# EAGLE board Gyrocam Servo Driver STM32G070KBT6_batch (EAGLE 9.6.2)
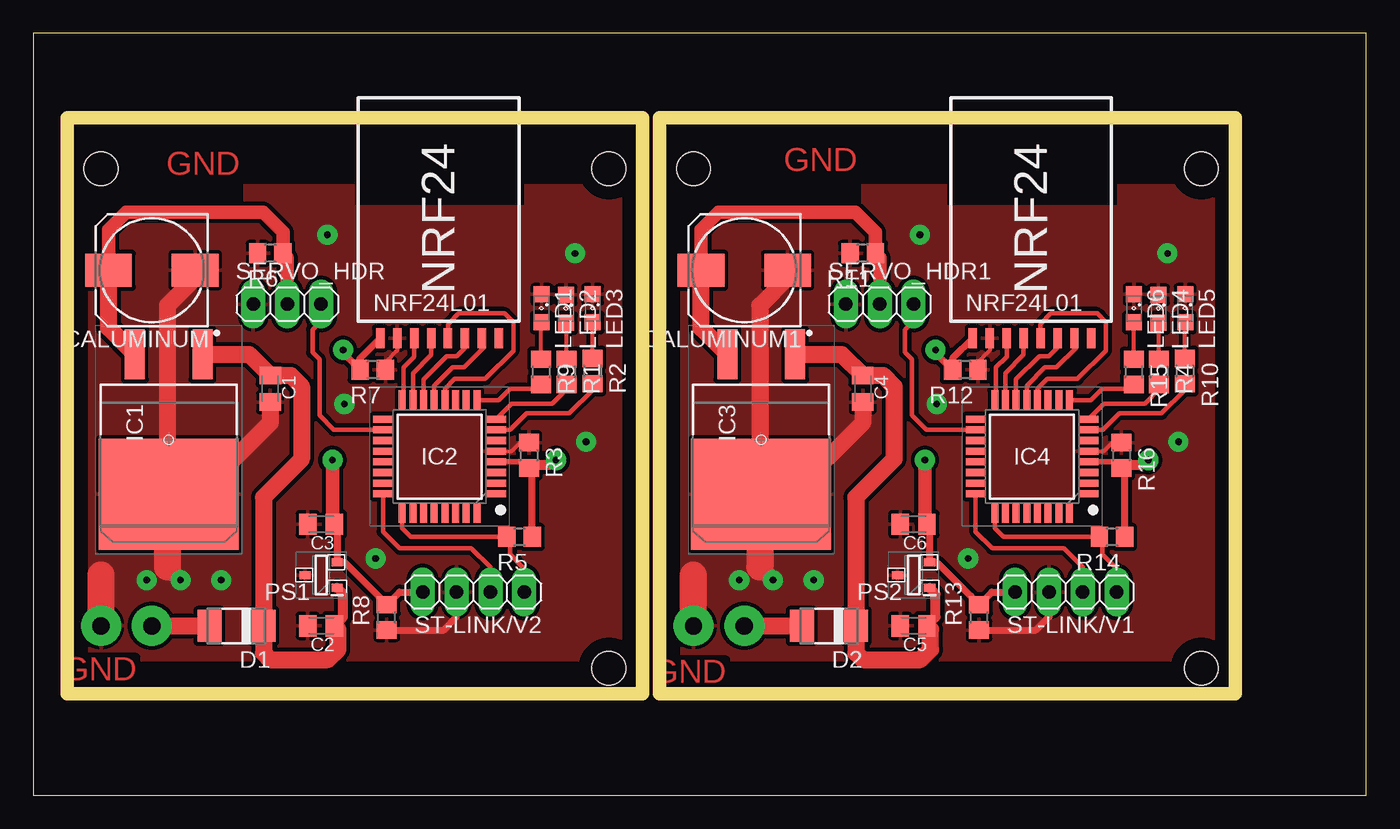
[diagram p0: board, top side]
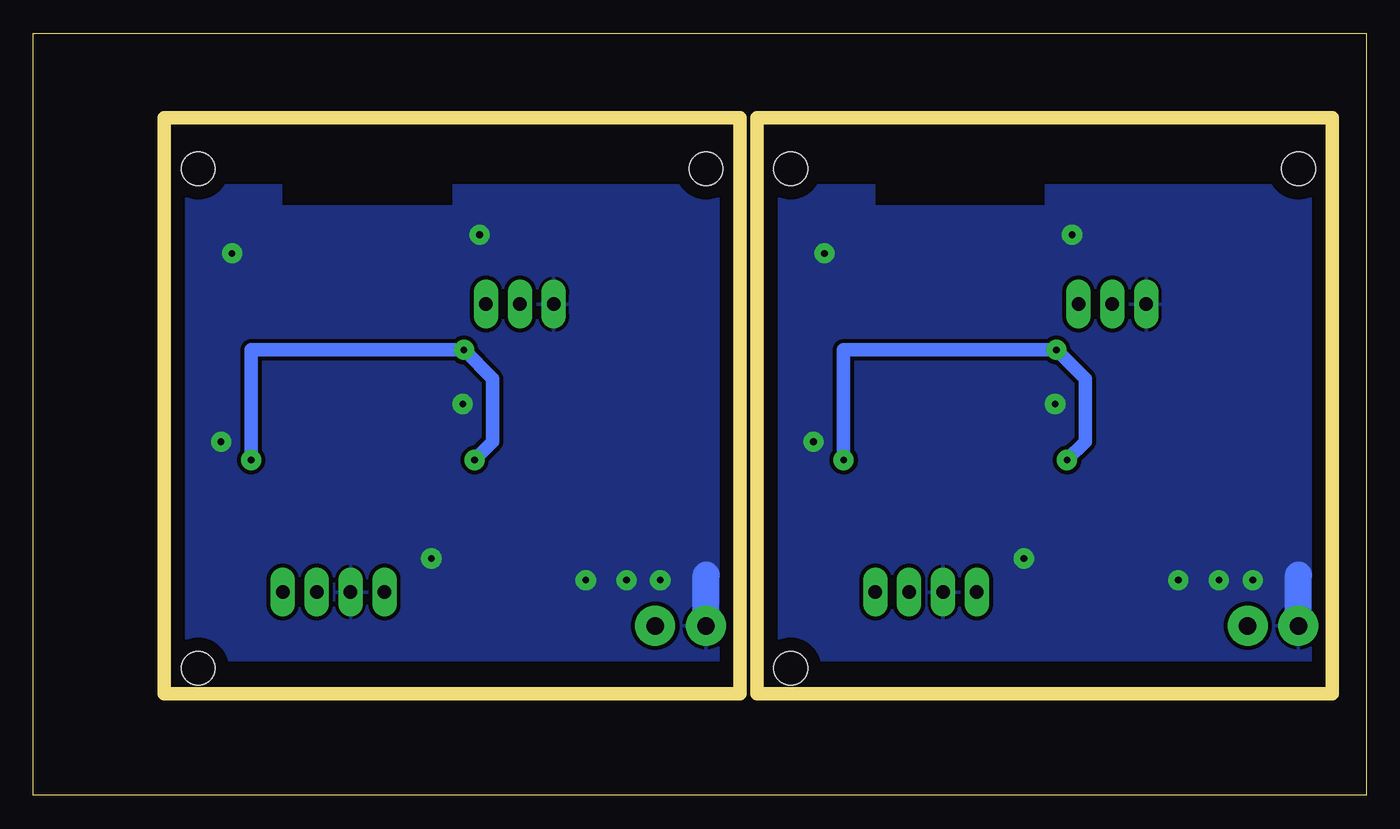
[diagram p1: board, bottom side, seen from below]

Size 100 x 57.14 mm. Coordinates in mm from the lower left corner, seen from the top.
Outline: 0,0 100,0 100,57.14 0,57.14 0,0
Outline: 2.54,7.62 45.72,7.62 45.72,50.8 2.54,50.8 2.54,7.62
Outline: 46.99,7.62 90.17,7.62 90.17,50.8 46.99,50.8 46.99,7.62
Copper layers (1*16): Top 0.035mm / dielectric 1.5mm / Bottom 0.035mm
Design rules "default *": minimum track width 6mil, minimum drill 0.35mm, track to track 12mil, track to pad 12mil, pad to pad 12mil, via to via 12mil, smd to smd 6mil, copper to edge 40mil, drill to drill 6mil, minimum pad ring 16mil, minimum via ring 20mil, stop-mask expansion 4mil, vias tented up to drill 0mil, thermal gap 10mil
Holes 2.54 mm at 5.08,46.99 43.18,46.99 43.18,9.53 49.53,46.99 87.63,46.99 87.63,9.53
Milling: 8 lines

## Footprints (pad centres in the part's own frame; a part is rotated, then mirrored left to right if it is on the bottom)
C0805K = smd 1.3 x 1.6: 1 -1,0; 2 1,0
153CLV-0810 = smd 3.5 x 2.5: + 3.25,0; - -3.25,0
DO-214AC = smd 1.8 x 2.4: A 2.025,0; C -2.025,0
TO254P1542X460-3N = smd 3.75 x 1.5: 1 -6.4,2.54; 3 -6.4,-2.54 | smd 8.3 x 10.5: 4 4.1,0
QFP80P900X900X160-32N = smd 1.475 x 0.533: 1 -4.238,2.8; 2 -4.238,2; 3 -4.238,1.2; 4 -4.238,0.4; 5 -4.238,-0.4; 6 -4.238,-1.2; 7 -4.238,-2; 8 -4.238,-2.8; 17 4.238,-2.8; 18 4.238,-2; 19 4.238,-1.2; 20 4.238,-0.4; 21 4.238,0.4; 22 4.238,1.2; 23 4.238,2; 24 4.238,2.8 | smd 0.533 x 1.475: 9 -2.8,-4.238; 10 -2,-4.238; 11 -1.2,-4.238; 12 -0.4,-4.238; 13 0.4,-4.238; 14 1.2,-4.238; 15 2,-4.238; 16 2.8,-4.238; 25 2.8,4.238; 26 2,4.238; 27 1.2,4.238; 28 0.4,4.238; 29 -0.4,4.238; 30 -1.2,4.238; 31 -2,4.238; 32 -2.8,4.238
SML0805 = smd 1.2 x 1.2: A 1.05,0; C -1.05,0
SOT96P240X120-3N = smd 0.85 x 0.6: 1 -1.2,0.96; 2 -1.2,-0.96; 3 1.2,0
R0805 = smd 1.3 x 1.5: 1 -0.95,0; 2 0.95,0
1X03 = drill 1.016 long: 1 -2.54,0; 2 0,0; 3 2.54,0
1X04 = drill 1.016 long: 1 -3.81,0; 2 -1.27,0; 3 1.27,0; 4 3.81,0
NRF24L01_SMD = smd 1.5 x 0.635: 1 0,4.445; 2 0,3.175; 3 0,1.905; 4 0,0.635; 5 0,-0.635; 6 0,-1.905; 7 0,-3.175; 8 0,-4.445
PINHEAD2_18AWG = drill 1.3 pad 3: 1 0,1.27; 2 0,-2.54

## Placement (x,y rotation side)
C1  0.1uf  [C0805K]  17.78,30.48 270 top
C2  2uf  [C0805K]  21.59,12.7 180 top
C3  2uf  [C0805K]  21.59,20.32 180 top
C4  0.1uf  [C0805K]  62.23,30.48 270 top
C5  2uf  [C0805K]  66.04,12.7 180 top
C6  2uf  [C0805K]  66.04,20.32 180 top
CALUMINUM  220uF  [153CLV-0810]  8.89,39.37 180 top
CALUMINUM1  220uF  [153CLV-0810]  53.34,39.37 180 top
D1  DIODE  [DO-214AC]  15.24,12.7 180 top
D2  DIODE  [DO-214AC]  59.69,12.7 180 top
IC1  L7815CD2T-TR  [TO254P1542X460-3N]  10.16,26.67 270 top
IC2  STM32G070KBT6  [QFP80P900X900X160-32N]  30.48,25.4 180 top
IC3  L7815CD2T-TR  [TO254P1542X460-3N]  54.61,26.67 270 top
IC4  STM32G070KBT6  [QFP80P900X900X160-32N]  74.93,25.4 180 top
LED1  LEDG  [SML0805]  38.13,36.51 270 top
LED2  LEDY  [SML0805]  39.97,36.48 270 top
LED3  LEDR  [SML0805]  41.97,36.51 270 top
LED4  LEDY  [SML0805]  84.42,36.48 270 top
LED5  LEDR  [SML0805]  86.42,36.51 270 top
LED6  LEDG  [SML0805]  82.58,36.51 270 top
PS1  AP7381-33SA-7  [SOT96P240X120-3N]  21.59,16.51 180 top
PS2  AP7381-33SA-7  [SOT96P240X120-3N]  66.04,16.51 180 top
R1  330  [R0805]  40.01,31.75 270 top
R2  330  [R0805]  41.94,31.81 270 top
R3  .1uF  [R0805]  37.18,25.5 270 top
R4  330  [R0805]  84.45,31.75 270 top
R5  1k  [R0805]  36.48,19.37 180 top
R6  0.1uF  [R0805]  17.78,40.64 180 top
R7  .1uF  [R0805]  25.46,31.91 180 top
R8  0.1uF  [R0805]  26.51,13.34 90 top
R9  330  [R0805]  38.1,31.75 270 top
R10  330  [R0805]  86.39,31.81 270 top
R11  0.1uF  [R0805]  62.23,40.64 180 top
R12  .1uF  [R0805]  69.91,31.91 180 top
R13  0.1uF  [R0805]  70.96,13.34 90 top
R14  1k  [R0805]  80.93,19.37 180 top
R15  330  [R0805]  82.55,31.75 270 top
R16  .1uF  [R0805]  81.63,25.5 270 top
SERVO_HDR  [1X03]  19.05,36.83 0 top
SERVO_HDR1  [1X03]  63.5,36.83 0 top
ST-LINK/V1  [1X04]  77.47,15.24 180 top
ST-LINK/V2  [1X04]  33.02,15.24 180 top
U$1  NRF24L01  [NRF24L01_SMD]  74.93,34.29 90 top
U$2  NRF24L01  [NRF24L01_SMD]  30.48,34.29 90 top
U$3  PINHEAD2_18AAWG  [PINHEAD2_18AWG]  52.07,12.7 270 top
U$5  PINHEAD2_18AAWG  [PINHEAD2_18AWG]  7.62,12.7 270 top

## Library data of the parts
C1-C6 CALUMINUM CALUMINUM1 = rcl; SPICEPREFIX: C
D1 D2 = diode
IC1 IC3 = 6voltsL7815CD2T-TR; DESCRIPTION: Voltage Regulator 15V 1.5A D2PAK STMicroelectronics L7815CD2T-TR, Single Linear Voltage Regulator, 1.5A 15 V, 3-Pin D2PAK; HEIGHT: 4.6mm; MANUFACTURER_NAME: STMicroelectronics; MANUFACTURER_PART_NUMBER: L7815CD2T-TR; MOUSER_PART_NUMBER: 511-L7815CD2T-TR; MOUSER_PRICE-STOCK: https://www.mouser.co.uk/ProductDetail/STMicroelectronics/L7815CD2T-TR?qs=UnsPL7ngM55qtUyn38JDrw%3D%3D
IC2 IC4 = mouser-STM32G070KBT6; DESCRIPTION: 32-bit Microcontrollers - MCU Arm Cortex -M0+ 32-bit MCU, 128 KB Flash, 36 KB RAM, 4x USART, timers, ADC, comm. I/Fs, 2.0-3.6V; HEIGHT: 1.6mm; MANUFACTURER_NAME: STMicroelectronics; MANUFACTURER_PART_NUMBER: STM32G070KBT6; MOUSER_PART_NUMBER: 511-STM32G070KBT6; MOUSER_PRICE-STOCK: https://www.mouser.co.uk/ProductDetail/STMicroelectronics/STM32G070KBT6?qs=l7cgNqFNU1hmGcXjKEot4A%3D%3D
LED1-LED6 = led
PS1 PS2 = 3.3v_AP7381-33SA-7; DESCRIPTION: LDO CMOS LowCurr SOT23 T&R 3K; HEIGHT: 1.2mm; MANUFACTURER_NAME: Diodes Inc.; MANUFACTURER_PART_NUMBER: AP7381-33SA-7; MOUSER_PART_NUMBER: 621-AP7381-33SA-7; MOUSER_PRICE-STOCK: https://www.mouser.co.uk/ProductDetail/Diodes-Incorporated/AP7381-33SA-7?qs=y6ZabgHbY%252ByfboEZm%252BnPlA%3D%3D
R1-R16 = rcl; SPICEPREFIX: R
SERVO_HDR SERVO_HDR1 ST-LINK/V1 ST-LINK/V2 = pinhead
U$1-U$3 U$5 = Gil

## Nets
12V: C1.1 C2.1 D1.C IC1.1 PS1.1
12V1: C4.1 C5.1 D2.C IC3.1 PS2.1
+3V1: C6.1 IC4.4 PS2.2 R12.2 R13.2 R14.1 R16.2 ST-LINK/V1.4 U$1.1
+3V3: C3.1 IC2.4 PS1.2 R3.2 R5.1 R7.2 R8.2 ST-LINK/V2.4 U$2.1
+5V: CALUMINUM.+ IC1.3 R6.1 SERVO_HDR.2
+5V1: CALUMINUM1.+ IC3.3 R11.1 SERVO_HDR1.2
+12V: D1.A U$5.1
+12V1: D2.A U$3.1
CE: IC2.16 U$2.3
CE1: IC4.16 U$1.3
CSN: IC2.15 U$2.4
CSN1: IC4.15 U$1.4
GND: C1.2 C2.2 C3.2 CALUMINUM.- IC1.4 IC2.5 LED1.C LED2.C LED3.C PS1.3 R3.1 R6.2 R7.1 R8.1 SERVO_HDR.1 ST-LINK/V2.3 U$2.2 U$5.2
GND1: C4.2 C5.2 C6.2 CALUMINUM1.- IC3.4 IC4.5 LED4.C LED5.C LED6.C PS2.3 R11.2 R12.1 R13.1 R16.1 SERVO_HDR1.1 ST-LINK/V1.3 U$1.2 U$3.2
LEDG: IC2.9 R9.2
LEDG1: IC4.9 R15.2
LEDR: IC2.7 R2.2
LEDR1: IC4.7 R10.2
LEDY: IC2.8 R1.2
LEDY1: IC4.8 R4.2
MISO: IC2.13 U$2.7
MISO1: IC4.13 U$1.7
MOSI: IC2.14 U$2.6
MOSI1: IC4.14 U$1.6
N$1: LED2.A R1.1
N$2: LED3.A R2.1
N$3: LED1.A R9.1
N$4: LED4.A R4.1
N$5: LED5.A R10.1
N$6: LED6.A R15.1
SCK: IC2.12 U$2.5
SCK1: IC4.12 U$1.5
SERVO: IC2.18 SERVO_HDR.3
SERVO1: IC4.18 SERVO_HDR1.3
SWCLK/BOOT: IC2.25 R5.2 ST-LINK/V2.1
SWCLK/BOOT1: IC4.25 R14.2 ST-LINK/V1.1
SWDIO: IC2.24 ST-LINK/V2.2
SWDIO1: IC4.24 ST-LINK/V1.2

## Tracks (layer width: path | path; a pad name or v marks a point on that pad's centre or on a via)
12V
  Top 0.762: C2.1 23.24,13.35 23.24,15.1 PS1.1
  Top 1.27: C2.1 22.86,12.43 22.86,10.92 22.1,10.16 17.78,10.16 17.27,10.68 D1.C 17.27,22.34 20.13,25.21 20.13,30.67 19.32,31.48 C1.1 16.19,33.07 IC1.1
12V1
  Top 0.762: C5.1 67.69,13.35 67.69,15.1 PS2.1
  Top 1.27: C5.1 67.31,12.43 67.31,10.92 66.55,10.16 62.23,10.16 61.72,10.68 D2.C 61.72,22.34 64.58,25.21 64.58,30.67 63.77,31.48 C4.1 60.64,33.07 IC3.1
+3V1  (via drill 0.5)
  Top 0.305: 81.17,25 R16.2
  Top 0.406: IC4.4 81.17,25
  Top 0.508: C6.1 67.24,20.12 PS2.2 67.81,17.47 70.36,14.93 R13.2 71.92,15.24 ST-LINK/V1.4 | R16.2 82.04,24.55 82.39,24.89 83.41,24.89 v83.66,25.15 83.19,24.67 81.88,24.67 R14.1 | v67.69,33.4 67.69,33.18 R12.2 68.96,32.77 U$1.1
  Top 1.016: v66.9,25.15 66.9,20.46 C6.1
  Bottom 1.016: v66.9,25.15 65.53,26.51 65.53,31.24 v67.69,33.4 83.66,33.4 v83.66,25.15
+3V3  (via drill 0.5)
  Top 0.305: 36.72,25 R3.2
  Top 0.406: IC2.4 36.72,25
  Top 0.508: C3.1 22.79,20.12 PS1.2 23.36,17.47 25.91,14.93 R8.2 27.47,15.24 ST-LINK/V2.4 | R3.2 37.59,24.55 37.94,24.89 38.96,24.89 v39.21,25.15 38.73,24.67 37.43,24.67 R5.1 | v23.24,33.4 23.24,33.18 R7.2 24.51,32.77 U$2.1
  Top 1.016: v22.45,25.15 22.45,20.46 C3.1
  Bottom 1.016: v22.45,25.15 21.08,26.51 21.08,31.24 v23.24,33.4 39.21,33.4 v39.21,25.15
+5V
  Top 1.016: CALUMINUM.+ 5.64,42.41 6.95,43.72 17.24,43.72 18.73,42.23 R6.1 19.05,40.32 SERVO_HDR.2
  Top 1.27: IC1.3 5.64,35.05 CALUMINUM.+ 5.64,39.93
+5V1
  Top 1.016: CALUMINUM1.+ 50.09,42.41 51.4,43.72 61.69,43.72 63.18,42.23 R11.1 63.5,40.32 SERVO_HDR1.2
  Top 1.27: IC3.3 50.09,35.05 CALUMINUM1.+ 50.09,39.93
+12V
  Top 1.27: U$5.1 D1.A
+12V1
  Top 1.27: U$3.1 D2.A
CE
  Top 0.305: IC2.16 27.77,29.73
  Top 0.356: 27.77,29.73 27.77,32.09 28.57,32.89 U$2.3
CE1
  Top 0.305: IC4.16 72.22,29.73
  Top 0.356: 72.22,29.73 72.22,32.09 73.03,32.89 U$1.3
CSN
  Top 0.356: IC2.15 28.48,31.66 29.84,33.02 U$2.4
CSN1
  Top 0.356: IC4.15 72.93,31.66 74.3,33.02 U$1.4
GND  (via drill 0.5, 0.5 pad 1.07)
  Top 0.305: IC2.5 35.87,25.8 36.51,26.45 R3.1 | U$2.2 27.3,33.37 26.41,32.48 R7.1
  Top 0.508: R8.1 30.77,12.38 31.75,13.37 ST-LINK/V2.3
  Top 1.27: v11.05,16.13 10.05,17.13 | C1.2 17.78,27.94 12.41,22.57 IC1.4 10.05,22.46 10.05,36.72 12.14,38.81 CALUMINUM.-
  Top 2.032: 10.05,22.46 10.05,17.13 | U$5.2 5.08,16.51
  Bottom 2.032: U$5.2 5.08,16.51
  other vias: 14.1,16.13 40.64,40.64 23.34,29.34 41.47,26.51 25.69,17.75 8.51,16.13 22.07,42.04
  pour Top: 3.81,10.16 3.81,45.72 44.45,45.72 44.45,10.16
  pour Bottom: 3.81,10.16 3.81,45.72 44.45,45.72 44.45,10.16
GND1  (via drill 0.5, 0.5 pad 1.07)
  Top 0.305: IC4.5 80.31,25.8 80.96,26.45 R16.1 | U$1.2 71.75,33.37 70.86,32.48 R12.1
  Top 0.508: R13.1 75.22,12.38 76.2,13.37 ST-LINK/V1.3
  Top 1.27: v55.5,16.13 54.5,17.13 | C4.2 62.23,27.94 56.86,22.57 IC3.4 54.5,22.46 54.5,36.72 56.59,38.81 CALUMINUM1.-
  Top 2.032: 54.5,22.46 54.5,17.13 | U$3.2 49.53,16.51
  Bottom 2.032: U$3.2 49.53,16.51
  other vias: 58.55,16.13 85.09,40.64 67.79,29.34 85.92,26.51 70.14,17.75 52.96,16.13 66.52,42.04
  pour Top: 48.26,10.16 48.26,45.72 88.9,45.72 88.9,10.16
  pour Bottom: 48.26,10.16 48.26,45.72 88.9,45.72 88.9,10.16
LEDG
  Top 0.356: IC2.9 34.91,29.64 35.75,30.48 37.78,30.48 R9.2
LEDG1
  Top 0.356: IC4.9 79.36,29.64 80.2,30.48 82.23,30.48 R15.2
LEDR
  Top 0.305: IC2.7 34.79,27.48
  Top 0.356: IC2.7 35.78,27.4 37.02,28.64 40.2,28.64 41.94,30.39 R2.2
LEDR1
  Top 0.305: IC4.7 79.24,27.48
  Top 0.356: IC4.7 80.23,27.4 81.47,28.64 84.64,28.64 86.39,30.39 R10.2
LEDY
  Top 0.356: IC2.8 35.89,29.37 38.92,29.37 40.01,30.45 R1.2
LEDY1
  Top 0.356: IC4.8 80.34,29.37 83.38,29.37 84.45,30.45 R4.2
MISO
  Top 0.305: U$2.7 33.8,34.15 33.8,33.57
  Top 0.356: IC2.13 30.08,30.71 31.46,32.09 32.32,32.09 33.8,33.57
MISO1
  Top 0.305: U$1.7 78.25,34.15 78.25,33.57
  Top 0.356: IC4.13 74.53,30.71 75.91,32.09 76.77,32.09 78.25,33.57
MOSI
  Top 0.356: IC2.14 29.28,31.18 31.02,32.92 31.75,32.92 32.38,33.56 U$2.6
MOSI1
  Top 0.356: IC4.14 73.73,31.18 75.47,32.92 76.2,32.92 76.83,33.56 U$1.6
N$1
  Top 0.305: R1.1 40.01,35.4 LED2.A
N$2
  Top 0.305: R2.1 41.94,35.43 LED3.A
N$3
  Top 0.305: R9.1 38.1,35.43 LED1.A
N$4
  Top 0.305: R4.1 84.45,35.4 LED4.A
N$5
  Top 0.305: R10.1 86.39,35.43 LED5.A
N$6
  Top 0.305: R15.1 82.55,35.43 LED6.A
SCK
  Top 0.305: U$2.5 31.1,34.3
  Top 0.356: IC2.12 30.88,30.49 31.62,31.23 33.9,31.23 36.02,33.35 36.02,35.48 35.37,36.13 31.91,36.13 31.1,35.33 31.1,34.3
SCK1
  Top 0.305: U$1.5 75.55,34.3
  Top 0.356: IC4.12 75.33,30.49 76.07,31.23 78.35,31.23 80.47,33.35 80.47,35.48 79.82,36.13 76.36,36.13 75.55,35.33 75.55,34.3
SERVO
  Top 0.356: IC2.18 22.54,27.4 21.46,28.48 21.46,32.7 20.95,33.21 20.95,34.92 21.59,35.56 SERVO_HDR.3
SERVO1
  Top 0.356: IC4.18 66.99,27.4 65.91,28.48 65.91,32.7 65.41,33.21 65.41,34.92 66.04,35.56 SERVO_HDR1.3
SWCLK/BOOT
  Top 0.305: R5.2 35.75,19.15
  Top 0.356: IC2.25 27.68,20.01 28.32,19.37 R5.2 | 35.75,19.15 35.75,18.07 36.83,16.99 ST-LINK/V2.1
SWCLK/BOOT1
  Top 0.305: R14.2 80.2,19.15
  Top 0.356: IC4.25 72.13,20.01 72.77,19.37 R14.2 | 80.2,19.15 80.2,18.07 81.28,16.99 ST-LINK/V1.1
SWDIO
  Top 0.356: IC2.24 26.24,19.76 27.5,18.51 32.86,18.51 34.29,17.08 ST-LINK/V2.2
SWDIO1
  Top 0.356: IC4.24 70.69,19.76 71.94,18.51 77.31,18.51 78.74,17.08 ST-LINK/V1.2

## Text on the board
Top: GND | GND | GND | GND